# Altium PCB pcb.PcbDoc
Units mm, origin at the board's own origin, x right, y up, seen from the top; angles counter-clockwise.
Board outline 70 x 60 mm, 2 copper layers (Top Layer, Bottom Layer); 7 components, 16 nets, 59 pads, 4 vias.
Unrouted connection lines stored in the file: 5.
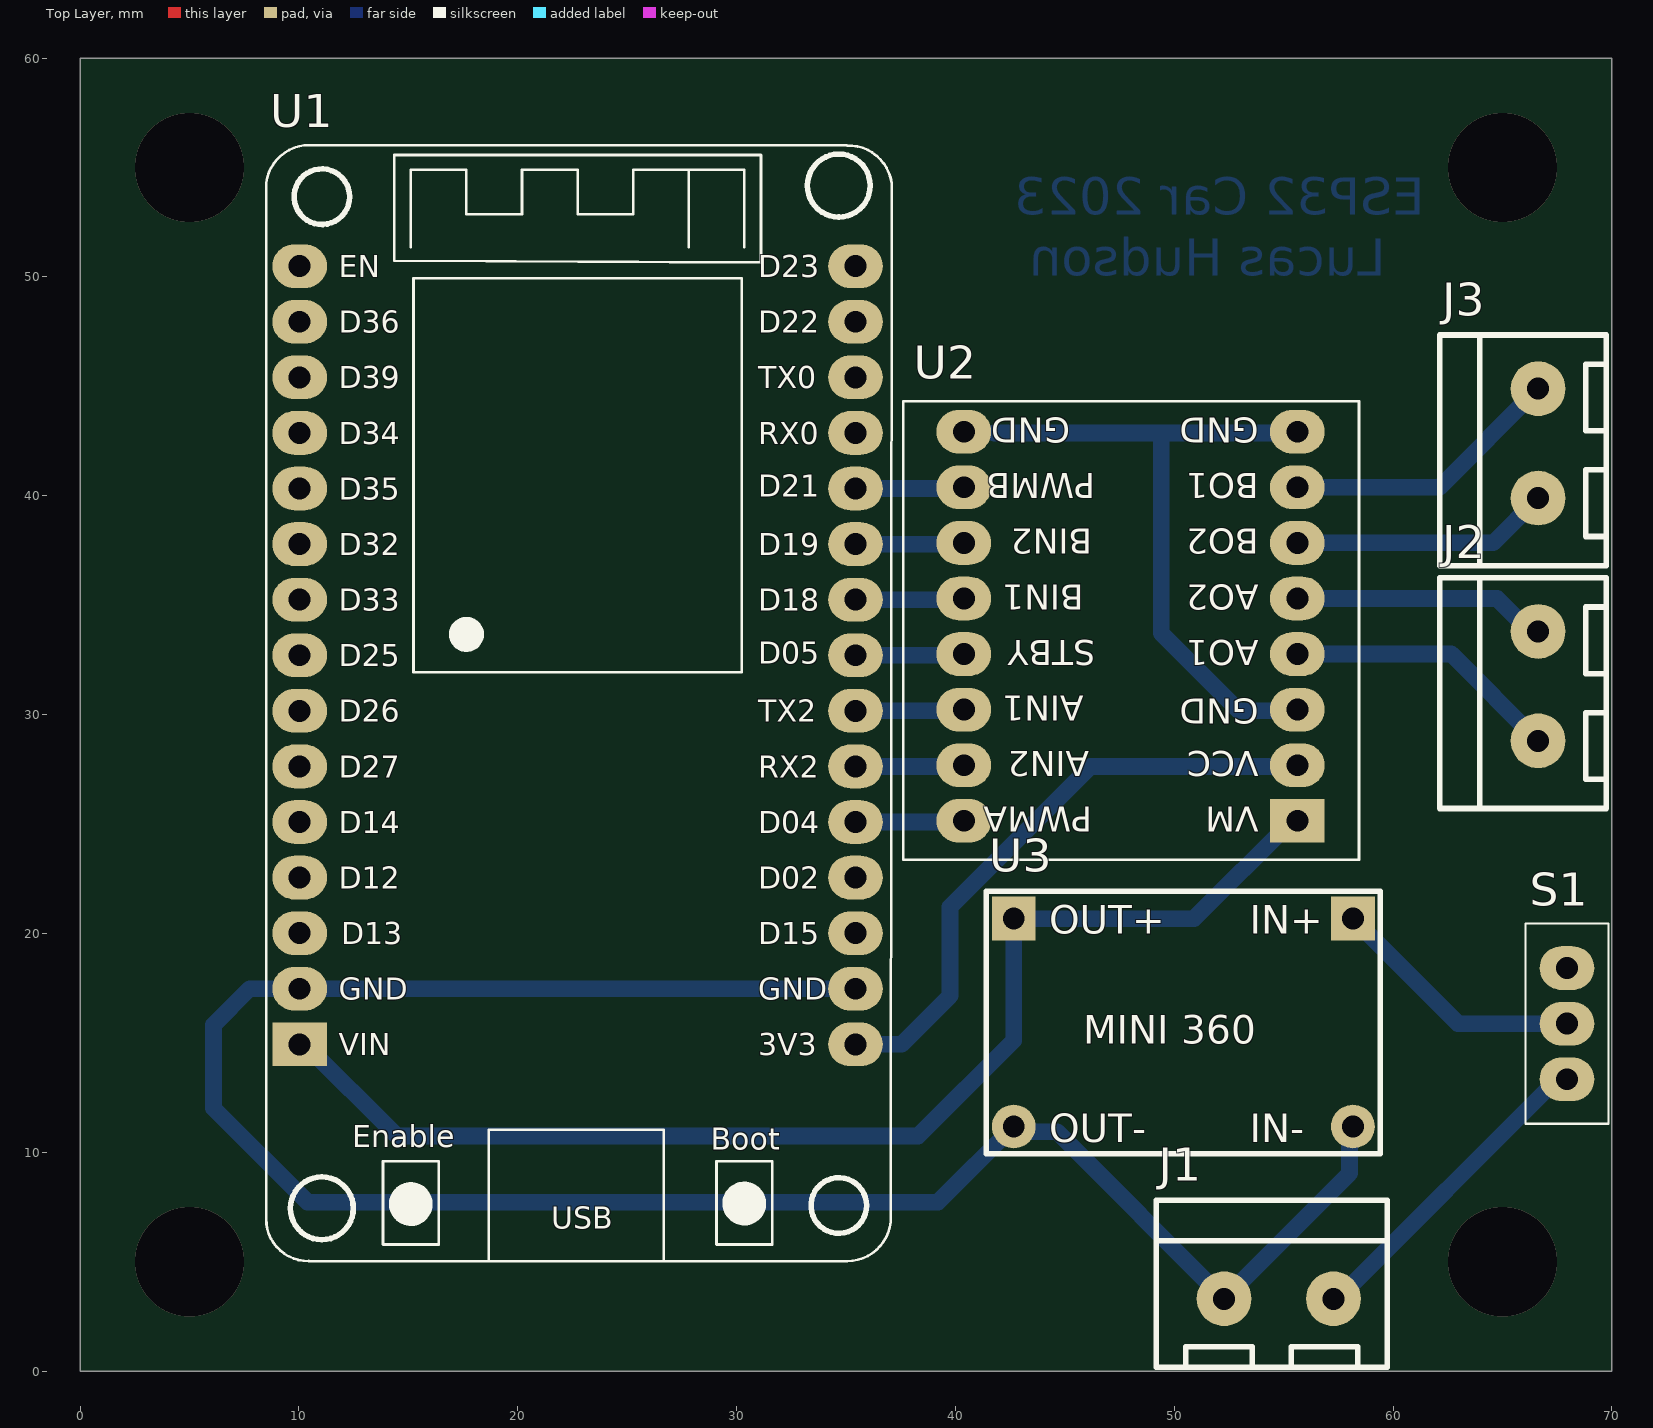
[diagram p0: Top Layer view]
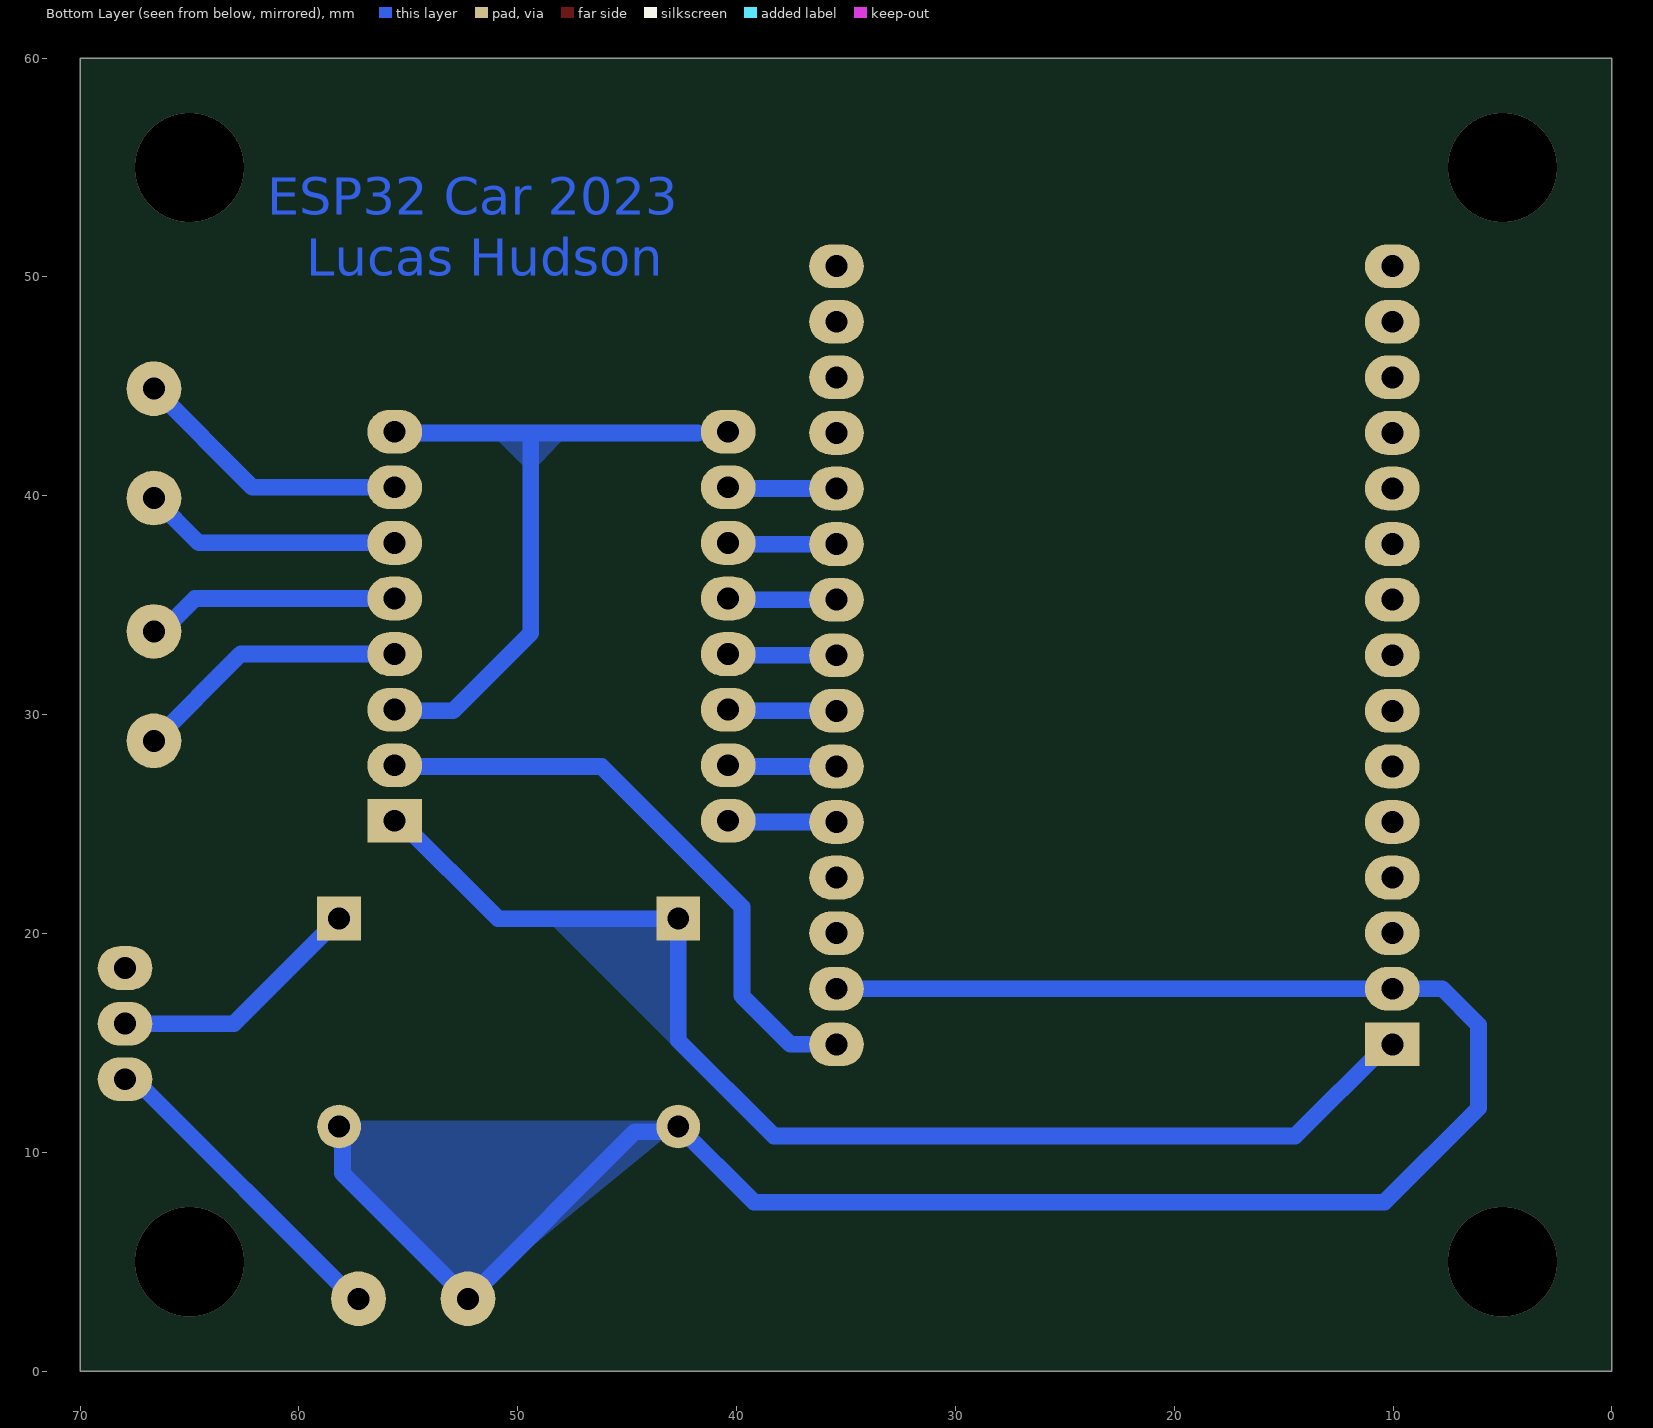
[diagram p1: Bottom Layer view, seen from below]
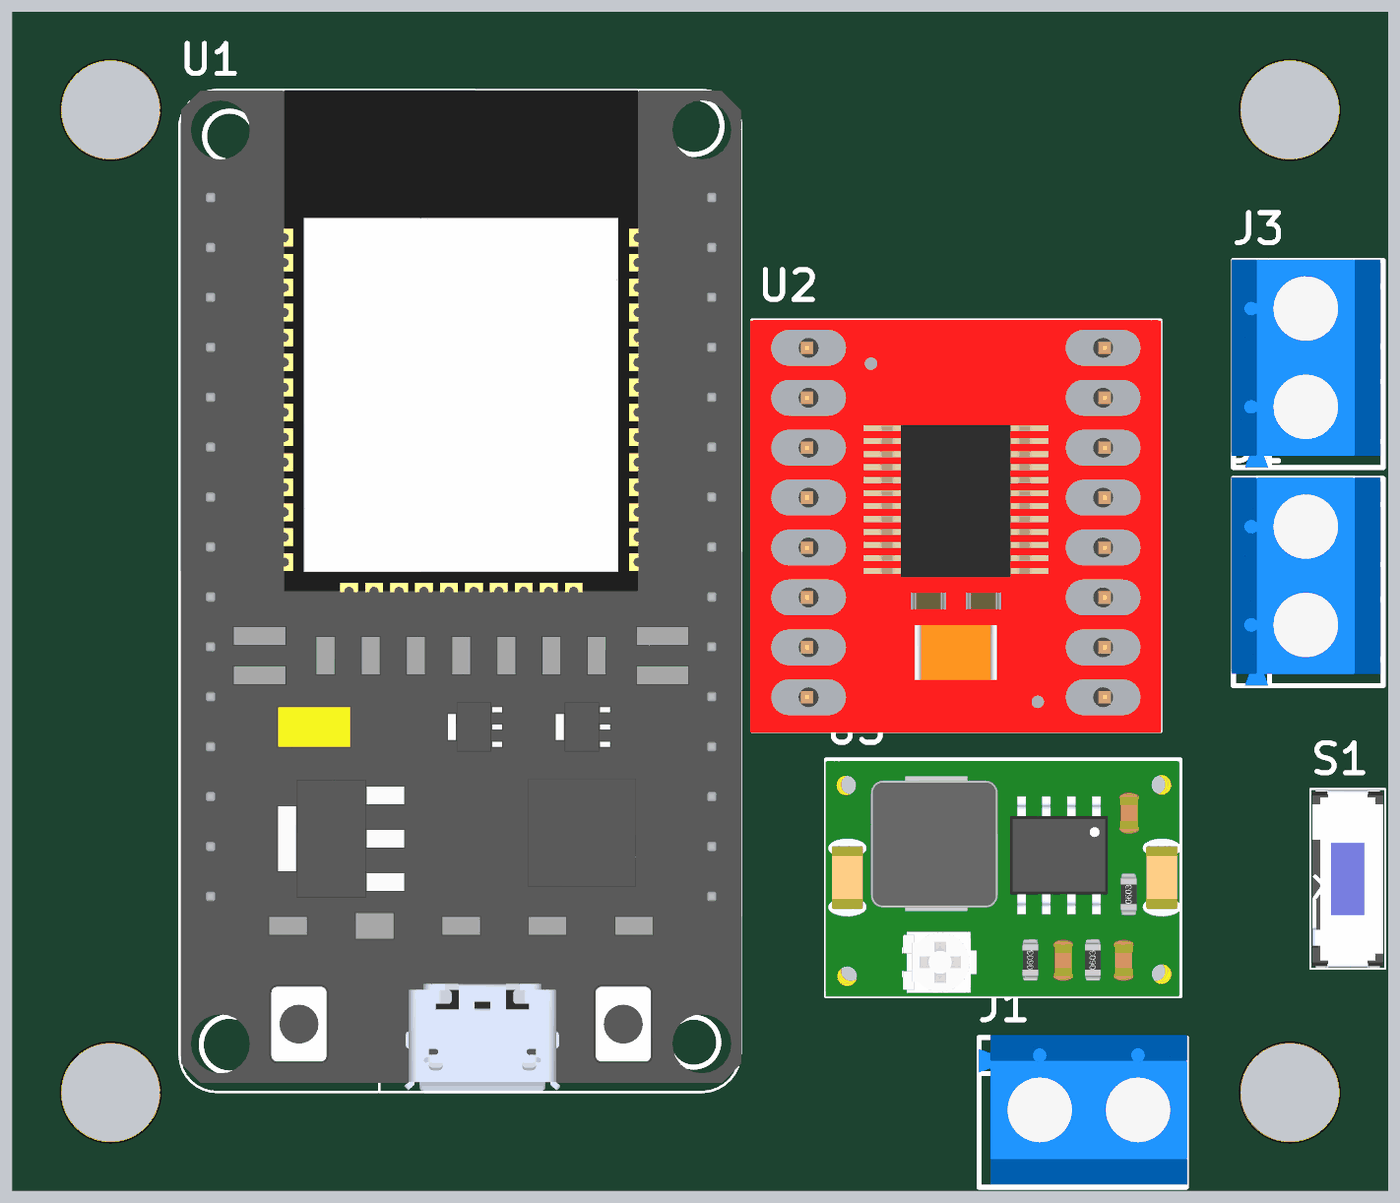
[diagram p2: 3D render of the assembled board from above, using the file's embedded part models]

## Layer stack, top to bottom
Top Solder: solder mask 0.0102, Solder Resist, Dk 3.5
Top Layer: signal copper 0.0356
Dielectric 1: dielectric 0.32, FR-4, Dk 4.8
Bottom Layer: signal copper 0.0356
Bottom Solder: solder mask 0.0102, Solder Resist, Dk 3.5

## Board outline
0,0 0,60 70,60 70,0

## Design rules (kind name [scope] priority, off if disabled: settings)
Clearance [All] p1: gap=0.254 ignorepadtopadclearanceinfootprint=FALSE except(0: Arc-Hole Track-Hole SMDPad-Hole THPad-Hole Via-Hole Fill-Hole Poly-Hole Region-Hole Text-Hole; 0.4: Arc-Fill Arc-Poly Arc-Region Track-Fill Track-Poly Track-Region SMDPad-Fill SMDPad-Poly SMDPad-Region THPad-Fill THPad-Poly THPad-Region Via-Fill Via-Poly Via-Region Fill-Fill Fill-Poly Fill-Region Poly-Poly Poly-Region Region-Region)
HoleSize [All] p1: absolutevalues=TRUE maxlimit=5 minlimit=0.025 maxpercent=80.000 minpercent=20.000
PolygonConnect [All] p1: connectstyle=Direct reliefconductorwidth=0.254 reliefentries=4 polygonreliefangle="90 Angle" airgapwidth=0.254
RoutingVias [All] p1: holewidth=5 width=5 viastyle="Through Hole" minholewidth=5 minwidth=5 maxholewidth=5 maxwidth=5
SilkToSilkClearance [All] p1: silktosilkclearance=0
SilkToSolderMaskClearance [IsPad] p1: minsilkscreentomaskgap=0 clearancetoexposedcopper=TRUE
SolderMaskExpansion [All] p1: expansion=0.102 istentingtop=FALSE
Width [All] p1: maxlimit=0.762 minlimit=0.762 preferedwidth=0.762 minimp=50.000000 maximp=50.000000 favimp=50.000000
27 further rules are at their usual default settings.

## Components (designator, comment, footprint, x,y, rotation, side; value= is the part's Value field where it differs from the comment)
J1 "BORNE_2VIAS" BORNE_2_VIAS 49.186,7.802 r270 top
J2 "BORNE_2VIAS" BORNE_2_VIAS 62.127,25.708 r0 top
J3 "BORNE_2VIAS" BORNE_2_VIAS 62.127,36.804 r0 top
S1 "SS12D00G4" SS12D00G4 69.804,11.306 r90 top
U1 "ESP32_30" ESP32_30 8.636,5.152 r0 top
U2 "MODULE_TB6612FNG" MODULE_TB6612FNG 58.318,44.323 r180 top
U3 "MINI360" MINI360 41.375,21.886 r270 top

## Footprints (in the part's own frame and the unit in brackets; to place one, negate y for a bottom-side part, rotate by r counter-clockwise, add the part's x,y. Pads: shape width x height; smd on the part's side, far side on the other; paste and mask are expansions set on the pad)
BORNE_2_VIAS [mm]
  round 2.5 hole 1: 1(4.5,8.091) 2(4.5,3.091)
  silkscreen extent 0,0 7.62,10.54, body extent -0.12,-0.01 7.48,10.59, height 10.1
ESP32_30 [mm] "Microcontoller Board 30 Pins Wifi 2.4GHz BLE 4.2 ESP32-WROOM-32D"
  oval 2.5x2 hole 1: 1(1.397,45.339) 2(1.397,42.799) 3(1.397,40.259) 4(1.397,37.719) 5(1.397,35.179) 6(1.397,32.639) 7(1.397,30.099) 8(1.397,27.559) 9(1.397,25.019) 10(1.397,22.479) 11(1.397,19.939) 12(1.397,17.399) 13(1.397,14.859) 14(1.397,12.319) 16(26.797,45.339) 17(26.797,42.799) 18(26.797,40.259) 19(26.797,37.719) 20(26.797,35.179) 21(26.797,32.639) 22(26.797,30.099) 23(26.797,27.559) 24(26.797,25.019) 25(26.797,22.479) 26(26.797,19.939) 27(26.797,17.399) 28(26.797,14.859) 29(26.797,12.319) 30(26.797,9.779)
  rect 2.5x2 hole 1: 15(1.397,9.779)
  silkscreen extent -0.14,-0.13 28.45,50.87, body extent -0.05,-0.05 28.45,50.85, height 7
MINI360 [mm] "MODULE BUCK STEP DOWN 3A 18x12mm"
  round 2 hole 1: 1(10.71,16.791) 2(10.71,1.291)
  rect 2x2 hole 1: 3(1.21,16.791) 4(1.21,1.291)
  silkscreen extent -0.04,0.04 11.96,18.04, body extent 0.01,0 12.01,18.09, height 4.5
MODULE_TB6612FNG [mm] "Module Dual Motor Driver 2.5-13.5V 3.2A Peak 21x18mm"
  rect 2.5x2 hole 1: 1(2.692,19.177)
  oval 2.5x2 hole 1: 2(2.692,16.637) 3(2.692,14.097) 4(2.692,11.557) 5(2.692,9.017) 6(2.692,6.477) 7(2.692,3.937) 8(2.692,1.397) 9(17.932,1.397) 10(17.932,3.937) 11(17.932,6.477) 12(17.932,9.017) 13(17.932,11.557) 14(17.932,14.097) 15(17.932,16.637) 16(17.932,19.177)
  silkscreen extent -0.13,0.01 20.7,20.96, body extent -0.14,0.01 20.76,20.99, height 6.12
SS12D00G4 [mm]
  oval 2x2.5 hole 1: 1(2.029,1.859) 2(4.569,1.859) 3(7.109,1.859)
  silkscreen extent 0,-0.04 9.14,3.76, body extent 0.07,0.06 9.07,3.66, height 5.5

## Part data
U1: "Microcontoller Board 30 Pins Wifi 2.4GHz BLE 4.2 ESP32-WROOM-32D", ComponentLink1Description=Datasheet, ComponentLink1URL=https://www.mouser.com/datasheet/2/891/esp32_wroom_32d_esp32_wroom_32u_datasheet_en-1365844.pdf
U2: "Module Dual Motor Driver 2.5-13.5V 3.2A Peak 21x18mm", ComponentLink1Description=Datasheet, ComponentLink1URL=https://www.mouser.com/datasheet/2/408/TB6612FNG_datasheet_en_20141001-708260.pdf
U3: "MODULE BUCK STEP DOWN 3A 18x12mm", ComponentLink1Description=Datasheet, ComponentLink1URL=https://cdn-shop.adafruit.com/datasheets/MP2307_r1.9.pdf

## Via types
v1: diameter 5, hole 5, Top Layer to Bottom Layer, 4 vias

## Nets (pads, with @x,y where several pads share a name; then routed paths per layer and width w, separated by ;. In a path a pad name is that pad's centre, name@x,y a point inside that pad or via, vN(x,y) a via of type N, cw(c..) or ccw(c..) an arc to the next point about the centre after c; other vN are vias at no path point)
3V3: U1.30 U2.2 | length 27.8
  Bottom Layer w0.762: U1.30 37.537,14.931 39.751,17.145 39.751,21.209 46.173,27.631 U2.2@55.626,27.631
AIN1: U1.24 U2.14 | length 5
  Bottom Layer w0.762: U1.24 U2.14@40.4,30.171
AIN2: U1.25 U2.15 | length 5
  Bottom Layer w0.762: U1.25 U2.15@40.4,27.631
AO1: J2.2 U2.4 | length 12.6
  Bottom Layer w0.762: U2.4 62.66,32.766 J2.2
AO2: J2.1 U2.5 | length 11.6
  Bottom Layer w0.762: U2.5 64.75,35.306 66.257,33.799 J2.1
BIN1: U1.22 U2.12 | length 5
  Bottom Layer w0.762: U1.22 U2.12@40.4,35.251
BIN2: U1.21 U2.11 | length 5
  Bottom Layer w0.762: U1.21 U2.11@40.4,37.791
BO1: J3.2 U2.6 | length 11.8
  Bottom Layer w0.762: U2.6 64.578,37.846 J3.2
BO2: J3.1 U2.7 | length 12.9
  Bottom Layer w0.762: U2.7 62.118,40.386 J3.1
GND: J1.2 U1.14 U1.29 U2.3 U2.8 U2.9 U3.1 U3.2 | length 127.9
  Bottom Layer w0.762: U1.29 22.352,17.471 U1.14 7.747,17.471 6.096,15.82 6.096,12.01 10.389,7.717 39.207,7.717 U3.2 42.903,10.939 44.64,10.939 J1.2 58.008,9.033 58.008,11.018 U3.1 ; 41.783,42.871 49.403,42.871 ; U2.8@55.419,43.184 55.679,42.924 55.626,42.871 49.403,42.871 ; U2.3@55.626,30.171 52.959,30.171 49.403,33.727 49.403,42.871
  other v1: 5,5 65,5 5,55 65,55
NetJ1_1: J1.1 S1.1 | length 14.8
  Bottom Layer w0.762: J1.1 57.469,3.302 67.502,13.335 S1.1
PWMA: U1.26 U2.16 | length 5
  Bottom Layer w0.762: U1.26 U2.16@40.4,25.091
PWMB: U1.20 U2.10 | length 5
  Bottom Layer w0.762: U1.20 U2.10@40.4,40.331
STBY: U1.23 U2.13 | length 5
  Bottom Layer w0.762: U1.23 U2.13@40.4,32.711
V6: U1.15 U2.1 U3.4 | length 56.6
  Bottom Layer w0.762: U1.15 10.283,14.931 14.474,10.74 38.298,10.74 42.666,15.108 U3.4 50.906,20.676 55.376,25.146 U2.1
VCC: S1.2 U3.3 | length 11.8
  Bottom Layer w0.762: U3.3 62.967,15.875 S1.2
pads on no net: S1.3 U1.1 U1.2 U1.3 U1.4 U1.5 U1.6 U1.7 U1.8 U1.9 U1.10 U1.11 U1.12 U1.13 U1.16 U1.17 U1.18 U1.19 U1.27 U1.28

## Polygon pours and split planes (outlines as drawn)
GND on Bottom Layer "NONET_L-01_P-001" (solid, remove dead copper, pour order 3): 52.277,3.302 58.293,9.318 58.293,11.43 42.92,11.43 42.666,11.176
GND on Bottom Layer "NONET_L-01_P-001" (solid, remove dead copper, pour order 2): 49.403,41.021 51.308,42.926 47.625,42.926 47.498,43.053
V6 on Bottom Layer "NONET_L-01_P-001" (solid, remove dead copper, pour order 0): 42.666,20.676 42.672,20.67 42.672,14.605 48.778,20.711

## Other copper
Bottom Layer:
  pour cut-out: 14.351,55.626 14.351,50.673 31.115,50.673 31.115,55.626
  pour cut-out: 37.211,18.542 37.211,16.256 37.719,16.256 37.719,18.542
  pour cut-out: 69.85,20.447 66.04,20.447 66.04,11.303 69.85,11.303
  pour cut-out: 62.103,47.371 69.723,47.371 69.723,25.781 69.596,25.654 62.103,25.654
  pour cut-out: 53.721,29.083 57.658,29.083 57.658,23.749 53.721,23.749
  pour cut-out: 53.752,41.863 57.435,41.863 57.435,31.369 53.752,31.369 53.752,40.72
  pour cut-out: 38.608,41.91 42.291,41.91 42.291,23.749 38.608,23.749 38.608,40.767
  pour cut-out: 11.758,16.399 8.329,16.399 8.329,13.351 11.758,13.351
  pour cut-out: 37.211,16.383 33.782,16.383 33.782,11.557 37.211,11.557
  pour cut-out: 37.211,51.943 37.211,18.542 33.782,18.542 33.782,51.943
  pour cut-out: 11.684,51.903 11.684,18.542 8.255,18.542 8.255,51.903
  text "ESP32 Car 2023" at 61.449,52.851 h1.7
  text "Lucas Hudson" at 59.671,50.057 h1.7

## Silkscreen, mask and mechanical layers (free items; w line width, h text height)
Mechanical 1:
  the board outline again, w0.254

## Text inside footprints (layer, text, board x,y; h text height)
U1: Top Overlay "Enable" at 12.446,10.232 h1; Top Overlay "Boot" at 28.829,10.105 h1; Top Overlay "USB" at 21.533,6.501 h1; Top Overlay "EN" at 11.811,49.983 h1; Top Overlay "D36" at 11.811,47.443 h1; Top Overlay "D39" at 11.811,44.903 h1; Top Overlay "D34" at 11.811,42.363 h1; Top Overlay "D35" at 11.811,39.823 h1; Top Overlay "D32" at 11.811,37.283 h1; Top Overlay "D33" at 11.811,34.743 h1; Top Overlay "D13" at 11.938,19.503 h1; Top Overlay "D12" at 11.811,22.043 h1; Top Overlay "D14" at 11.811,24.583 h1; Top Overlay "D27" at 11.811,27.123 h1; Top Overlay "D26" at 11.811,29.663 h1; Top Overlay "D25" at 11.811,32.203 h1; Top Overlay "D05" at 30.988,32.33 h1; Top Overlay "TX2" at 30.988,29.663 h1; Top Overlay "RX2" at 30.988,27.123 h1; Top Overlay "D04" at 30.988,24.583 h1; Top Overlay "D02" at 30.988,22.043 h1; Top Overlay "D15" at 30.988,19.503 h1; Top Overlay "D18" at 30.988,34.743 h1; Top Overlay "D19" at 30.988,37.283 h1; Top Overlay "D21" at 30.988,39.95 h1; Top Overlay "RX0" at 30.988,42.363 h1; Top Overlay "TX0" at 30.988,44.903 h1; Top Overlay "D22" at 30.988,47.443 h1; Top Overlay "D23" at 30.988,49.983 h1; Top Overlay "GND" at 30.988,16.963 h1; Top Overlay "3V3" at 30.988,14.423 h1; Top Overlay "VIN" at 11.811,14.423 h1; Top Overlay "GND" at 11.811,16.963 h1
U2: Top Overlay "STBY" at 46.38,33.401 h1.14 r180; Top Overlay "AIN1" at 45.872,30.861 h1.14 r180; Top Overlay "BIN2" at 46.253,38.481 h1.14 r180; Top Overlay "PWMB" at 46.38,41.021 h1.14 r180; Top Overlay "BIN1" at 45.872,35.941 h1.14 r180; Top Overlay "GND" at 45.237,43.561 h1.14 r180; Top Overlay "AIN2" at 46.126,28.321 h1.14 r180; Top Overlay "PWMA" at 46.253,25.781 h1.14 r180; Top Overlay "GND" at 53.873,30.734 h1.14 r180; Top Overlay "BO2" at 53.873,38.481 h1.14 r180; Top Overlay "BO1" at 53.873,41.021 h1.14 r180; Top Overlay "AO2" at 53.873,35.941 h1.14 r180; Top Overlay "AO1" at 53.873,33.401 h1.14 r180; Top Overlay "GND" at 53.873,43.561 h1.14 r180; Top Overlay "VCC" at 53.873,28.321 h1.14 r180; Top Overlay "VM" at 53.873,25.781 h1.14 r180
U3: Top Overlay "OUT+" at 44.296,19.981 h1.3; Top Overlay "IN+" at 53.44,19.981 h1.3; Top Overlay "OUT-" at 44.296,10.456 h1.3; Top Overlay "IN-" at 53.44,10.456 h1.3; Top Overlay "MINI 360" at 45.847,14.961 h1.3